# EAGLE board AutonomousWateringSystem_Circuit (EAGLE 9.7.0)

Size 436.41 x 224.74 mm. Coordinates in mm from the lower left corner, seen from the top.
Outline: 0,0 436.41,0 436.41,224.74 0,224.74 0,0
Copper layers (1*16): Top 0.035mm / dielectric 1.5mm / Bottom 0.035mm
Design rules "default": minimum track width 6mil, minimum drill 0.35mm, track to track 6mil, track to pad 6mil, pad to pad 6mil, via to via 6mil, smd to smd 6mil, copper to edge 40mil, drill to drill 6mil, minimum pad ring 10mil, minimum via ring 8mil, stop-mask expansion 4mil, vias tented up to drill 0mil, thermal gap 10mil

## Footprints (pad centres in the part's own frame; a part is rotated, then mirrored left to right if it is on the bottom)
BATTERY-GENERIC = drill 1.118 pad 3.15 octagon: + 2.54,0; - -2.54,0
LEDRD254W60D565H860B_G = drill 0.981 pad 1.581: 1 -1.27,0; 2 1.27,0
LU-5-R = drill 0.8: 1 -6.35,-3.81; 5 3.81,-3.81; 6 6.35,-3.81; 7 6.35,3.81; 8 3.81,3.81; 12 -6.35,3.81
1X02 = drill 1.016 long: 1 -1.27,0; 2 1.27,0
GL5528 = drill 0.8 pad 1.4: 1 -1.702,0; 2 1.702,0
RESAD1016W63L850D250B = drill 0.83 pad 1.43: 1 -5.08,0; 2 5.08,0
SWITCH-MOMENTARY-PTH-6.5MM = drill 1.016 pad 1.88: 1 -3.251,2.261; 2 3.251,2.261; 3 -3.251,-2.261; 4 3.251,-2.261
SEN-13322 = drill 1.016 long: 1 -2.54,0; 2 0,0; 3 2.54,0
SG90 = drill 1.016 long: 1 -2.54,0; 2 0,0; 3 2.54,0
ARDUINO-UNO-R3-SHIELD = drill 1.016 pad 1.88: 3.3V 24.13,-2.54; 5V 24.13,0; A0 24.13,12.7; A1 24.13,15.24; A2 24.13,17.78; A3 24.13,20.32; A4 24.13,22.86; A5 24.13,25.4; AREF -24.13,-13.97; D2 -24.13,20.32; D3 -24.13,17.78; D4 -24.13,15.24; D5 -24.13,12.7; D6 -24.13,10.16; D7 -24.13,7.62; D8 -24.13,3.81; D9 -24.13,1.27; D10 -24.13,-1.27; D11 -24.13,-3.81; D12 -24.13,-6.35; D13 -24.13,-8.89; GND@0 24.13,2.54; GND@1 24.13,5.08; GND@2 -24.13,-11.43; IOREF 24.13,-7.62; NC 24.13,-10.16; RES 24.13,-5.08; RX -24.13,25.4; SCL -24.13,-19.05; SDA -24.13,-16.51; TX -24.13,22.86; VIN 24.13,7.62
TO92 = drill 0.813 octagon: 1 -1.27,0; 2 0,1.905; 3 1.27,0
LCD-I2C = drill 1.016 long: 1 -19.05,-5.08; 2 -19.05,-7.62; 3 -19.05,-10.16; 4 -19.05,-12.7

## Placement (x,y rotation side)
BAT1  9V  [BATTERY-GENERIC]  158.26,212.6 180 top
D1  GREEN  [LEDRD254W60D565H860B_G]  178.41,158.51 180 top
D2  GREEN  [LEDRD254W60D565H860B_G]  329.56,135.09 0 top
K1  RELAY-SPDT_LU-5-R  [LU-5-R]  277.05,105.75 180 top
M1  PINHD-1X02_1X02M  [1X02]  345.79,127.04 0 top
R1  PHOTOCELL_GL5528  [GL5528]  72.59,169.76 0 top
R2  PHOTOCELL_GL5528  [GL5528]  72.68,73.09 0 top
R3  PHOTOCELL_GL5528  [GL5528]  133.68,119.73 0 top
R4  10k  [RESAD1016W63L850D250B]  177.31,150.55 270 top
R5  10k  [RESAD1016W63L850D250B]  360.45,111.09 270 top
R6  PHOTOCELL_GL5528  [GL5528]  22.71,120.29 0 top
R7  10k  [RESAD1016W63L850D250B]  174.66,103.31 270 top
R8  10k  [RESAD1016W63L850D250B]  192.44,103.31 270 top
R9  10k  [RESAD1016W63L850D250B]  177.2,103.31 270 top
R10  10k  [RESAD1016W63L850D250B]  189.9,103.31 270 top
R11  10k  [RESAD1016W63L850D250B]  330.83,130.01 270 top
S1  SWITCH_MOMENTARY  [SWITCH-MOMENTARY-PTH-6.5MM]  363.14,136.48 90 top
SC1  BATTERYGENERIC  [BATTERY-GENERIC]  122.85,122.03 270 top
SEN1  SEN-13322  [SEN-13322]  429.42,56.92 0 top
SERVO1  SERVOSG90  [SG90]  6.99,121.89 270 top
SERVO2  SERVOSG90  [SG90]  72.84,183.14 180 top
U1  ARDUINO-UNO-R3-SHIELD  [ARDUINO-UNO-R3-SHIELD]  244.68,29.84 270 top
U2  TMP36GT9Z_TO92  [TO92]  359.72,55.54 0 top
U3  LCD-16X2-I2CSUNFOUNDER-IIC  [LCD-I2C]  362.99,217.2 0 top

## Library data of the parts
BAT1 K1 M1 R1-R11 S1 SC1 SEN1 SERVO1 SERVO2 U1-U3 = Tinkercad
D1 D2 = Tinkercad; CATEGORY: Opto-Electronic; SUB-CATEGORY: LED; VALUE: LED_GREEN

## Nets
BAT1+: BAT1.+ D1.1 SC1.+ U1.VIN
BAT1-: BAT1.- K1.8 M1.1 R5.2 R7.2 R8.2 R9.2 R10.2 R11.2 SC1.- SEN1.2 SERVO1.1 SERVO2.1 U1.GND@0 U1.GND@1 U1.GND@2 U2.1 U3.1
D1_C: D1.2 R4.1
D2_C: D2.2 R11.1
M1_2: D2.1 K1.12 M1.2
U1_5V: K1.6 R1.2 R2.2 R3.2 R6.2 S1.3 SEN1.1 SERVO1.2 SERVO2.2 U1.5V U2.3 U3.2
U1_A0: U1.A0 U2.2
U1_A1: SEN1.3 U1.A1
U1_A2: R6.1 R10.1 U1.A2
U1_A3: R3.1 R8.1 U1.A3
U1_A4: R1.1 R7.1 U1.A4
U1_A5: R2.1 R9.1 U1.A5
U1_D2: R5.1 S1.1 S1.2 U1.D2
U1_D9: SERVO2.3 U1.D9
U1_D10: SERVO1.3 U1.D10
U1_D11: K1.5 U1.D11
U1_SCL: U1.SCL U3.4
U1_SDA: U1.SDA U3.3

## Tracks (layer width: path | path; a pad name or v marks a point on that pad's centre or on a via)
BAT1+  (3 unrouted)
BAT1-  (17 unrouted)
D1_C  (1 unrouted)
D2_C  (1 unrouted)
M1_2  (2 unrouted)
U1_5V  (11 unrouted)
U1_A0  (1 unrouted)
U1_A1  (1 unrouted)
U1_A2  (2 unrouted)
U1_A3  (2 unrouted)
U1_A4  (2 unrouted)
U1_A5  (2 unrouted)
U1_D2  (3 unrouted)
U1_D9  (1 unrouted)
U1_D10  (1 unrouted)
U1_D11  (1 unrouted)
U1_SCL  (1 unrouted)
U1_SDA  (1 unrouted)